# EAGLE board Ingenious Bojo-Kasi (EAGLE 9.7.0)

Size 378.54 x 135.35 mm. Coordinates in mm from the lower left corner, seen from the top.
Outline: 0,0 378.54,0 378.54,135.35 0,135.35 0,0
Copper layers (1*16): Top 0.035mm / dielectric 1.5mm / Bottom 0.035mm
Design rules "default": minimum track width 6mil, minimum drill 0.35mm, track to track 6mil, track to pad 6mil, pad to pad 6mil, via to via 6mil, smd to smd 6mil, copper to edge 40mil, drill to drill 6mil, minimum pad ring 10mil, minimum via ring 8mil, stop-mask expansion 4mil, vias tented up to drill 0mil, thermal gap 10mil

## Footprints (pad centres in the part's own frame; a part is rotated, then mirrored left to right if it is on the bottom)
BATTERY-GENERIC = drill 1.118 pad 3.15 octagon: + 2.54,0; - -2.54,0
LEDRD254W60D565H860B = drill 0.981 pad 1.581: 1 -1.27,0; 2 1.27,0
RESAD1016W63L850D250B = drill 0.83 pad 1.43: 1 -5.08,0; 2 5.08,0
78B04ST = drill 0.8: 1 -3.81,-3.81; 2 -1.27,-3.81; 3 1.27,-3.81; 4 3.81,-3.81; 5 3.81,3.81; 6 1.27,3.81; 7 -1.27,3.81; 8 -3.81,3.81
TO220V = drill 1.016 long: 1 -2.54,-2.54; 2 0,-2.54; 3 2.54,-2.54
DIP762W53P254L1969H508Q14B = drill 0.743 pad 1.343: 1 -3.81,7.62; 2 -3.81,5.08; 3 -3.81,2.54; 4 -3.81,0; 5 -3.81,-2.54; 6 -3.81,-5.08; 7 -3.81,-7.62; 8 3.81,-7.62; 9 3.81,-5.08; 10 3.81,-2.54; 11 3.81,0; 12 3.81,2.54; 13 3.81,5.08; 14 3.81,7.62

## Placement (x,y rotation side)
BAT1  9V  [BATTERY-GENERIC]  8.26,68.07 180 top
D1  RED  [LEDRD254W60D565H860B]  127.34,19.13 180 top
D2  RED  [LEDRD254W60D565H860B]  134.96,19.13 180 top
D3  RED  [LEDRD254W60D565H860B]  142.58,19.13 180 top
D4  RED  [LEDRD254W60D565H860B]  61.61,84.47 180 top
D5  RED  [LEDRD254W60D565H860B]  56.53,84.47 180 top
D6  RED  [LEDRD254W60D565H860B]  150.2,19.13 180 top
D7  RED  [LEDRD254W60D565H860B]  92.09,84.47 0 top
D8  RED  [LEDRD254W60D565H860B]  97.17,84.47 0 top
D9  RED  [LEDRD254W60D565H860B]  104.79,84.47 180 top
D10  RED  [LEDRD254W60D565H860B]  109.87,84.47 0 top
D11  RED  [LEDRD254W60D565H860B]  135.27,84.47 0 top
D12  RED  [LEDRD254W60D565H860B]  140.35,84.47 0 top
D13  RED  [LEDRD254W60D565H860B]  157.82,19.13 180 top
D14  RED  [LEDRD254W60D565H860B]  165.44,19.13 180 top
D15  RED  [LEDRD254W60D565H860B]  119.72,19.13 180 top
D16  RED  [LEDRD254W60D565H860B]  173.06,19.13 180 top
R1  220  [RESAD1016W63L850D250B]  70.5,81.93 0 top
R2  220  [RESAD1016W63L850D250B]  67.96,79.39 0 top
R3  220  [RESAD1016W63L850D250B]  83.2,79.39 0 top
R4  220  [RESAD1016W63L850D250B]  85.74,81.93 0 top
R5  220  [RESAD1016W63L850D250B]  174.33,8.97 90 top
R6  220  [RESAD1016W63L850D250B]  166.71,8.97 90 top
R7  220  [RESAD1016W63L850D250B]  111.14,79.39 0 top
R8  220  [RESAD1016W63L850D250B]  113.68,81.93 0 top
R9  220  [RESAD1016W63L850D250B]  126.38,79.39 0 top
R10  220  [RESAD1016W63L850D250B]  128.92,81.93 0 top
R11  220  [RESAD1016W63L850D250B]  159.09,8.97 90 top
R12  220  [RESAD1016W63L850D250B]  151.47,8.97 90 top
R13  220  [RESAD1016W63L850D250B]  143.85,8.97 90 top
R14  220  [RESAD1016W63L850D250B]  136.23,8.97 90 top
R15  220  [RESAD1016W63L850D250B]  128.61,8.97 90 top
R16  220  [RESAD1016W63L850D250B]  120.99,8.97 90 top
SW1  SPST-478B04ST  [78B04ST]  76.85,70.5 0 top
SW2  SPST-478B04ST  [78B04ST]  120.03,70.5 0 top
U1  LM7805_TO220V  [TO220V]  42.56,81.93 0 top
U2  74HC08_PDIP  [DIP762W53P254L1969H508Q14B]  118.46,127.35 90 top
U3  74HC08_PDIP  [DIP762W53P254L1969H508Q14B]  47.34,127.35 90 top
U4  74HC08_PDIP  [DIP762W53P254L1969H508Q14B]  82.9,127.35 90 top
U5  74HC08_PDIP  [DIP762W53P254L1969H508Q14B]  154.02,127.35 90 top
U6  74HC08_PDIP  [DIP762W53P254L1969H508Q14B]  221.31,127.7 90 top
U7  74HC86_PDIP  [DIP762W53P254L1969H508Q14B]  189.58,127.35 90 top
U8  74HC86_PDIP  [DIP762W53P254L1969H508Q14B]  256.87,127.7 90 top
U9  74HC08_PDIP  [DIP762W53P254L1969H508Q14B]  292.43,127.7 90 top
U10  74HC32_PDIP  [DIP762W53P254L1969H508Q14B]  221.38,70.52 90 top
U11  74HC86_PDIP  [DIP762W53P254L1969H508Q14B]  327.99,127.7 90 top
U12  74HC08_PDIP  [DIP762W53P254L1969H508Q14B]  363.55,127.7 90 top
U13  74HC86_PDIP  [DIP762W53P254L1969H508Q14B]  363.62,70.52 90 top
U14  74HC08_PDIP  [DIP762W53P254L1969H508Q14B]  328.06,70.52 90 top
U15  74HC32_PDIP  [DIP762W53P254L1969H508Q14B]  189.88,70.5 90 top
U16  74HC86_PDIP  [DIP762W53P254L1969H508Q14B]  292.5,70.52 90 top
U17  74HC08_PDIP  [DIP762W53P254L1969H508Q14B]  256.94,70.52 90 top

## Library data of the parts
BAT1 R1-R16 SW1 SW2 U1-U17 = Tinkercad
D1-D16 = Tinkercad; CATEGORY: Opto-Electronic; SUB-CATEGORY: LED; VALUE: LED_RED

## Nets
BAT1+: BAT1.+ U1.1
BAT1-: BAT1.- D1.2 D2.2 D3.2 D4.2 D5.2 D6.2 D7.2 D8.2 D9.2 D10.2 D11.2 D12.2 D13.2 D14.2 D15.2 D16.2 U1.2 U2.7 U3.7 U4.7 U5.7 U6.7 U7.7 U8.7 U9.7 U10.7 U11.7 U12.7 U13.7 U14.7 U15.7 U16.7 U17.7
D1_A: D1.1 R15.2
D2_A: D2.1 R14.2
D3_A: D3.1 R13.2
D4_A: D4.1 R2.1
D5_A: D5.1 R1.1
D6_A: D6.1 R12.2
D7_A: D7.1 R4.2
D8_A: D8.1 R3.2
D9_A: D9.1 R7.1
D10_A: D10.1 R8.1
D11_A: D11.1 R10.2
D12_A: D12.1 R9.2
D13_A: D13.1 R11.2
D14_A: D14.1 R6.2
D15_A: D15.1 R16.2
D16_A: D16.1 R5.2
U2_1B: R8.2 SW2.7 U2.2 U2.5 U2.10 U2.13
U2_1Y: U2.3 U8.12 U9.12
U2_2Y: U2.6 U8.9 U9.9
U2_3Y: U2.8 U11.10 U12.10
U2_4Y: U2.11 U11.5 U12.5
U3_1A: R4.1 SW1.5 U2.1 U3.1 U4.1 U5.1
U3_1B: R10.1 SW2.5 U3.2 U3.5 U3.10 U3.12
U3_1Y: R5.1 U3.3
U3_2A: R3.1 SW1.6 U2.4 U3.4 U4.4 U5.4
U3_2Y: U3.6 U6.1 U7.1
U3_3A: R2.2 SW1.8 U2.9 U3.9 U4.9 U5.9
U3_3Y: U3.8 U6.10 U7.10
U3_4Y: U3.11 U6.4 U7.4
U4_1Y: U4.3 U6.2 U7.2
U4_2Y: U4.6 U6.5 U7.5
U4_3B: R9.1 SW2.6 U4.2 U4.5 U4.10 U4.12
U4_3Y: U4.8 U8.4 U9.4
U4_4B: R1.2 SW1.7 U2.12 U3.13 U4.13 U5.12
U4_4Y: U4.11 U6.9 U7.9
U5_1B: R7.2 SW2.8 U5.2 U5.5 U5.10 U5.13
U5_1Y: U5.3 U13.5 U14.5
U5_2Y: U5.6 U13.12 U14.12
U5_3Y: U5.8 U16.13 U17.13
U5_4Y: U5.11 U16.2 U17.2
U6_2Y: U6.6 U10.1
U6_3Y: U6.8 U10.4
U6_4Y: U6.11 U10.2
U6_VCC: SW1.1 SW1.2 SW1.3 SW1.4 SW2.1 SW2.2 SW2.3 SW2.4 U1.3 U2.14 U3.14 U4.14 U5.14 U6.14 U7.14 U8.14 U9.14 U10.14 U11.14 U12.14 U13.14 U14.14 U15.14 U16.14 U17.14
U7_1Y: R6.1 U7.3
U7_2Y: U6.13 U7.6 U7.13
U7_3Y: U7.8 U8.1 U9.1
U7_4A: U6.3 U6.12 U7.12
U7_4Y: U7.11 U8.13 U9.13
U8_1B: U8.2 U9.2 U10.3
U8_1Y: U8.3 U8.10 U9.10
U8_2B: U8.5 U9.5 U10.6
U8_2Y: U8.6 U11.4 U12.4
U8_3Y: U8.8 U11.1 U12.1
U8_4Y: R11.1 U8.11
U9_1Y: U9.3 U10.5
U9_2Y: U9.6 U11.9 U12.9
U9_3Y: U9.8 U10.12
U9_4Y: U9.11 U11.2 U12.2
U10_4Y: U10.11 U11.12 U12.12
U11_1Y: U11.3 U13.4 U14.4
U11_2Y: U11.6 U11.13 U12.13
U11_3Y: U11.8 U13.1 U14.1
U11_4Y: U11.11 U13.13 U14.13
U12_1Y: U10.13 U12.3
U12_2Y: U10.9 U12.6
U12_3Y: U12.8 U15.2
U12_4Y: U10.10 U12.11
U13_1Y: U13.3 U16.1 U17.1
U13_2Y: R12.1 U13.6
U13_3A: U13.9 U14.6 U14.9
U13_3Y: R13.1 U13.8
U13_4Y: U13.10 U13.11 U14.10
U14_1B: U10.8 U13.2 U14.2
U14_1Y: U14.3 U15.1
U14_3Y: U14.8 U15.4
U14_4Y: U14.11 U15.5
U15_1Y: U15.3 U16.12 U17.12
U15_2Y: U15.6 U16.5 U17.5
U15_3Y: R16.1 U15.8
U15_4Y: U15.11 U16.9 U17.9
U16_1Y: U16.3 U16.4 U17.4
U16_2Y: R14.1 U16.6
U16_3Y: R15.1 U16.8
U16_4Y: U16.10 U16.11 U17.10
U17_1Y: U15.12 U17.3
U17_2Y: U15.13 U17.6
U17_3Y: U15.10 U17.8
U17_4Y: U15.9 U17.11

## Tracks (layer width: path | path; a pad name or v marks a point on that pad's centre or on a via)
BAT1+  (1 unrouted)
BAT1-  (33 unrouted)
D1_A  (1 unrouted)
D2_A  (1 unrouted)
D3_A  (1 unrouted)
D4_A  (1 unrouted)
D5_A  (1 unrouted)
D6_A  (1 unrouted)
D7_A  (1 unrouted)
D8_A  (1 unrouted)
D9_A  (1 unrouted)
D10_A  (1 unrouted)
D11_A  (1 unrouted)
D12_A  (1 unrouted)
D13_A  (1 unrouted)
D14_A  (1 unrouted)
D15_A  (1 unrouted)
D16_A  (1 unrouted)
U2_1B  (5 unrouted)
U2_1Y  (2 unrouted)
U2_2Y  (2 unrouted)
U2_3Y  (2 unrouted)
U2_4Y  (2 unrouted)
U3_1A  (5 unrouted)
U3_1B  (5 unrouted)
U3_1Y  (1 unrouted)
U3_2A  (5 unrouted)
U3_2Y  (2 unrouted)
U3_3A  (5 unrouted)
U3_3Y  (2 unrouted)
U3_4Y  (2 unrouted)
U4_1Y  (2 unrouted)
U4_2Y  (2 unrouted)
U4_3B  (5 unrouted)
U4_3Y  (2 unrouted)
U4_4B  (5 unrouted)
U4_4Y  (2 unrouted)
U5_1B  (5 unrouted)
U5_1Y  (2 unrouted)
U5_2Y  (2 unrouted)
U5_3Y  (2 unrouted)
U5_4Y  (2 unrouted)
U6_2Y  (1 unrouted)
U6_3Y  (1 unrouted)
U6_4Y  (1 unrouted)
U6_VCC  (24 unrouted)
U7_1Y  (1 unrouted)
U7_2Y  (2 unrouted)
U7_3Y  (2 unrouted)
U7_4A  (2 unrouted)
U7_4Y  (2 unrouted)
U8_1B  (2 unrouted)
U8_1Y  (2 unrouted)
U8_2B  (2 unrouted)
U8_2Y  (2 unrouted)
U8_3Y  (2 unrouted)
U8_4Y  (1 unrouted)
U9_1Y  (1 unrouted)
U9_2Y  (2 unrouted)
U9_3Y  (1 unrouted)
U9_4Y  (2 unrouted)
U10_4Y  (2 unrouted)
U11_1Y  (2 unrouted)
U11_2Y  (2 unrouted)
U11_3Y  (2 unrouted)
U11_4Y  (2 unrouted)
U12_1Y  (1 unrouted)
U12_2Y  (1 unrouted)
U12_3Y  (1 unrouted)
U12_4Y  (1 unrouted)
U13_1Y  (2 unrouted)
U13_2Y  (1 unrouted)
U13_3A  (2 unrouted)
U13_3Y  (1 unrouted)
U13_4Y  (2 unrouted)
U14_1B  (2 unrouted)
U14_1Y  (1 unrouted)
U14_3Y  (1 unrouted)
U14_4Y  (1 unrouted)
U15_1Y  (2 unrouted)
U15_2Y  (2 unrouted)
U15_3Y  (1 unrouted)
U15_4Y  (2 unrouted)
U16_1Y  (2 unrouted)
U16_2Y  (1 unrouted)
U16_3Y  (1 unrouted)
U16_4Y  (2 unrouted)
U17_1Y  (1 unrouted)
U17_2Y  (1 unrouted)
U17_3Y  (1 unrouted)
U17_4Y  (1 unrouted)